# Altium PCB 20路舵机控制模块PCB.PcbDoc
Units mil, origin at the board's own origin, x right, y up, seen from the top; angles counter-clockwise.
Board outline 2520 x 1070 mil, 2 copper layers (Top Layer, Bottom Layer); 40 components, 38 nets, 146 pads, 35 vias.
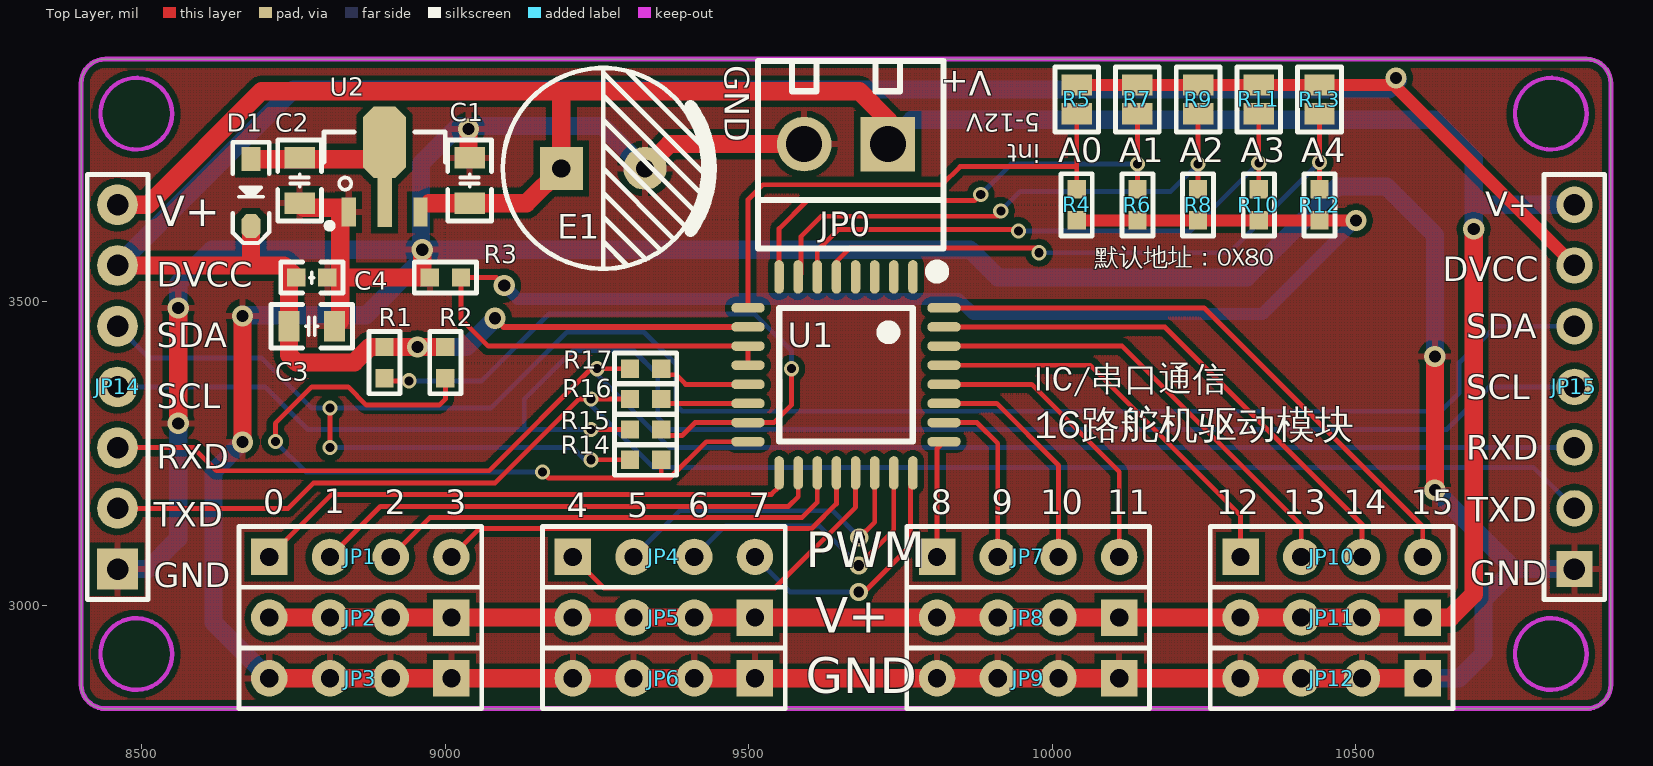
[diagram p0: Top Layer view]
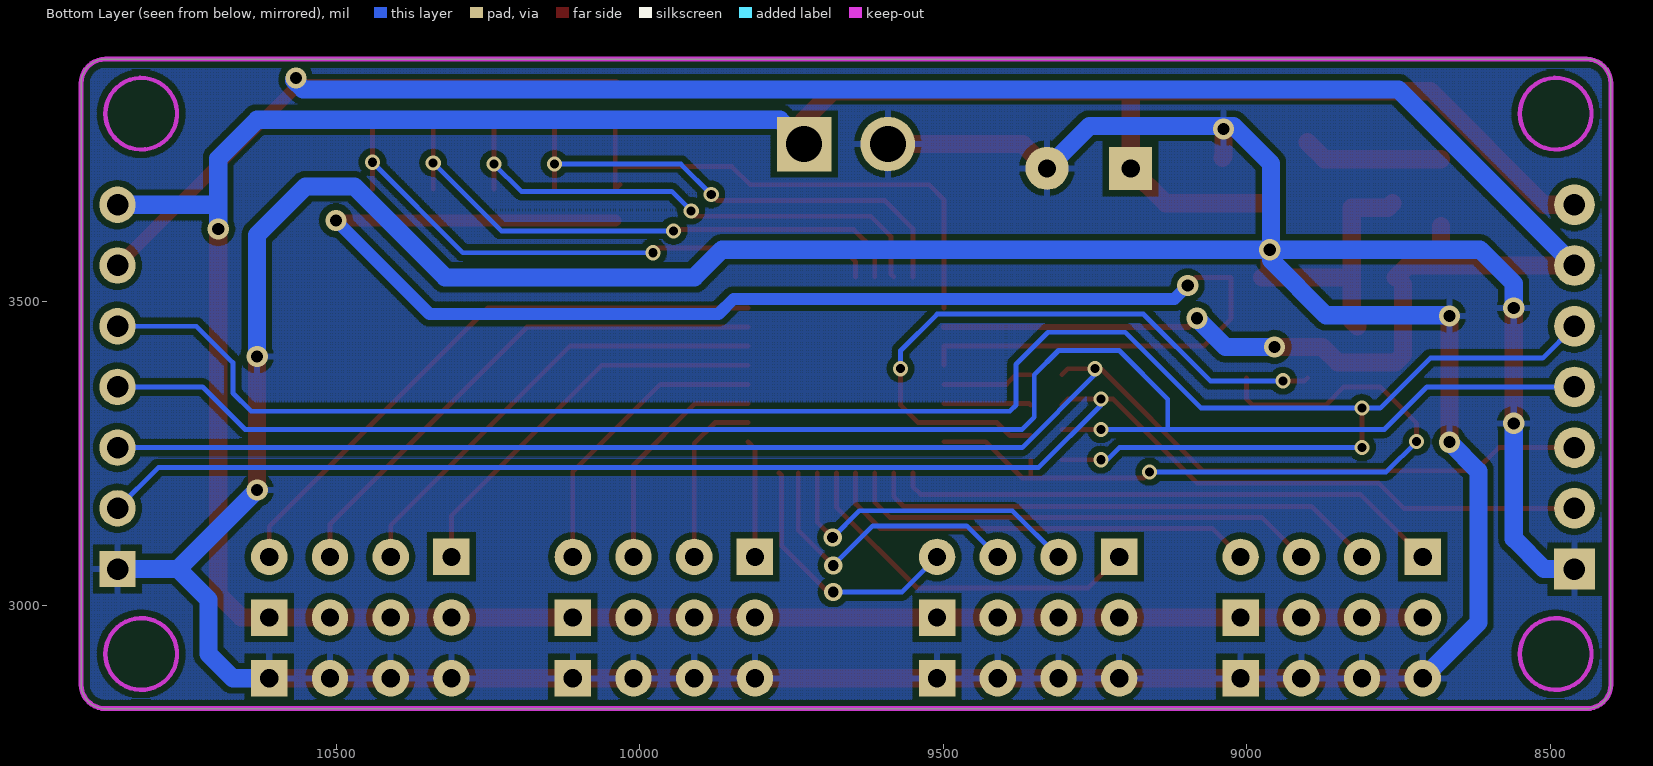
[diagram p1: Bottom Layer view, seen from below]

## Layer stack, top to bottom
Top Layer: signal copper 1.4
Dielectric: dielectric 12.6, FR-4, Dk 4.8
Bottom Layer: signal copper 1.4

## Board outline
8400,2870 8400,3860 cw(c8440,3860) 8440,3900 10880,3900 cw(c10880,3860) 10920,3860 10920,2870 cw(c10880,2870) 10880,2830 8440,2830 cw(c8440,2870)

## Design rules (kind name [scope] priority, off if disabled: settings)
Clearance [All] p1: gap=10
PolygonConnect [All] p1: connectstyle=Relief reliefconductorwidth=10 reliefentries=4 polygonreliefangle="90 Angle"
RoutingVias [All] p1: holewidth=28 width=50 viastyle="Through Hole" minholewidth=28 minwidth=50 maxholewidth=28 maxwidth=50
SilkscreenOverComponentPads [All] p1: minsilkscreentomaskgap=10
SolderMaskExpansion [All] p1: expansion=4
TestPointUsage [All] p1: valid=0 allowmultiple=FALSE
Testpoint [All] p1: side=15 testpointundercomponent=TRUE minsize=40 maxsize=100 preferedsize=60 minholesize=0 maxholesize=40 preferedholesize=32 testpointgrid=1 style=1023 order=0123456789
Width [All] p1: maxlimit=100 minlimit=6 preferedwidth=10
23 further rules are at their usual default settings.

## Components (designator, comment, footprint, x,y, rotation, side; value= is the part's Value field where it differs from the comment)
C1 "106" "C 0805_L" 9040,3700 r270 top
C2 "106" "C 0805_L" 8760,3700 r90 top
C3 "106" "C 0805_L" 8780,3460 r180 top
C4 "104" "C 0603_L" 8780,3540 r180 top
D1 "B5919WS" SOD-323 8680,3680 r270 top
E1 "470uF/16V" "CAP 3.5*8*11.5" 9260,3720 r0 top
JP0 "HDR-1X2" KF350-2P 9660,3760 r180 top
JP1 "HDR-1X4" HDR2.54-LI-4P 8860,3080 r0 top
JP2 "HDR-1X4" HDR2.54-LI-4P 8860,2980 r180 top
JP3 "HDR-1X4" HDR2.54-LI-4P 8860,2880 r180 top
JP4 "HDR-1X4" HDR2.54-LI-4P 9360,3080 r0 top
JP5 "HDR-1X4" HDR2.54-LI-4P 9360,2980 r180 top
JP6 "HDR-1X4" HDR2.54-LI-4P 9360,2880 r180 top
JP7 "HDR-1X4" HDR2.54-LI-4P 9960,3080 r0 top
JP8 "HDR-1X4" HDR2.54-LI-4P 9960,2980 r180 top
JP9 "HDR-1X4" HDR2.54-LI-4P 9960,2880 r180 top
JP10 "HDR-1X4" HDR2.54-LI-4P 10460,3080 r0 top
JP11 "HDR-1X4" HDR2.54-LI-4P 10460,2980 r180 top
JP12 "HDR-1X4" HDR2.54-LI-4P 10460,2880 r180 top
JP14 "HDR-1X7" HDR2.54-LI-7P#1 8460,3360 r90 top
JP15 "HDR-1X7" HDR2.54-LI-7P#2 10860,3360 r90 top
R1 "4.7K" "R 0603_L" 8900,3400 r90 top
R2 "4.7K" "R 0603_L" 9000,3400 r90 top
R3 "0R" "R 0603_L" 9000,3540 r0 top
R4 "4.7K" "R 0603_L" 10040,3660 r90 top
R5 "4.7K" "R 0805_L" 10040,3820 r270 top
R6 "4.7K" "R 0603_L" 10140,3660 r90 top
R7 "4.7K" "R 0805_L" 10140,3820 r270 top
R8 "4.7K" "R 0603_L" 10240,3660 r90 top
R9 "4.7K" "R 0805_L" 10240,3820 r270 top
R10 "4.7K" "R 0603_L" 10340,3660 r90 top
R11 "4.7K" "R 0805_L" 10340,3820 r270 top
R12 "4.7K" "R 0603_L" 10440,3660 r90 top
R13 "4.7K" "R 0805_L" 10440,3820 r270 top
R14 "200R" "R 0603_L" 9330,3240 r180 top
R15 "200R" "R 0603_L" 9330,3290 r180 top
R16 "200R" "R 0603_L" 9330,3340 r0 top
R17 "200R" "R 0603_L" 9330,3390 r0 top
U1 "STC8H1K16" "LQFP32 7X7_L" 9660,3380 r180 top
U2 "AMS1117-3V3" SOT89_L 8900,3660 r0 top

## Footprints (in the part's own frame and the unit in brackets; to place one, negate y for a bottom-side part, rotate by r counter-clockwise, add the part's x,y. Pads: shape width x height; smd on the part's side, far side on the other; paste and mask are expansions set on the pad)
"C 0603_L" [mil] "无极性贴片电容"
  rect 30x30 smd: 1(-25.59,0) 2(25.59,0)
  silkscreen extent -51,-26 51,26, body extent -31,-16 31,16, height 32
"C 0805_L" [mil] "无极性贴片电容"
  rect 35x50 smd: 1(-37.4,0) 2(37.4,0)
  silkscreen extent -67,-36 67,36, body extent -39,-24 39,24, height 20
"CAP 3.5*8*11.5" [mm] "脚距3.5mm直径8mm高度11.5mm"
  rect 1.8x1.8 hole 0.762: 1(-1.75,0)
  round 1.8 hole 0.762: 2(1.75,0)
  silkscreen extent -4.2,-4.2 4.5,4.2, body extent -4,-4 4.01,4, height 11.53
HDR2.54-LI-4P [mil] "排针，4脚"
  rect 60x60 hole 30: 1(-150,0)
  round 60 hole 30: 2(-50,0) 3(50,0) 4(150,0)
  silkscreen extent -200,-50 200,50, body extent -200,-50 200,50, height 335
HDR2.54-LI-7P#1 [mm] "排针，8脚"
  rect 1.7x1.7 hole 0.9: 1(-7.62,0)
  round 1.7 hole 0.9: 2(-5.08,0) 3(-2.54,0) 4(0,0) 5(2.54,0) 6(5.08,0) 7(7.62,0)
  silkscreen extent -8.89,-1.27 8.89,1.27, body extent -8.89,-1.27 8.89,1.27, height 8.5
HDR2.54-LI-7P#2 [mm] "排针，8脚"
  rect 1.524x1.524 hole 0.9: 1(-7.62,0)
  round 1.524 hole 0.9: 2(-5.08,0) 3(-2.54,0) 4(0,0) 5(2.54,0) 6(5.08,0) 7(7.62,0)
  silkscreen extent -8.89,-1.27 8.89,1.27, body extent -8.89,-1.27 8.89,1.27, height 8.5
KF350-2P [mil] "可拼接端子/10A"
  rect 90x90 hole 59.06: 1(-68.9,0)
  round 90 hole 59.06: 2(68.9,0)
  silkscreen extent -161,-137 145,172, body extent -154,-130 138,165, height 394
"LQFP32 7X7_L" [mm] "32脚，体宽7x7mm，脚距0.8mm"
  oval 0.4x1.4 smd: 1(-2.8,-4.096) 2(-2,-4.096) 3(-1.2,-4.096) 4(-0.4,-4.096) 5(0.4,-4.096) 6(1.2,-4.096) 7(2,-4.096) 8(2.8,-4.096) 17(2.8,4.108) 18(2,4.108) 19(1.2,4.108) 20(0.4,4.108) 21(-0.4,4.108) 22(-1.2,4.108) 23(-2,4.108) 24(-2.8,4.108)
  oval 1.4x0.4 smd: 9(4.102,-2.8) 10(4.102,-2) 11(4.102,-1.2) 12(4.102,-0.4) 13(4.102,0.4) 14(4.102,1.2) 15(4.102,2) 16(4.102,2.8) 25(-4.102,2.8) 26(-4.102,2) 27(-4.102,1.2) 28(-4.102,0.4) 29(-4.102,-0.4) 30(-4.102,-1.2) 31(-4.102,-2) 32(-4.102,-2.8)
  silkscreen extent -4.06,-4.57 2.79,2.79, body extent -4.5,-4.5 4.5,4.5, height 1.45
"R 0603_L" [mil] "1/10W贴片电阻"
  rect 30x30 smd: 1(-25.59,0) 2(25.59,0)
  silkscreen extent -51,-26 51,26, body extent -31,-16 32,16, height 16
"R 0805_L" [mil] "1/8W贴片电阻"
  rect 35x50 smd: 1(-37.4,0) 2(10,0)
  silkscreen extent -67,-36 40,36, body extent -39,-25 39,25, height 20
SOD-323 [mm] "1.8x1.3X0.9mm（长宽高，不包括引脚）"
  rect 1x0.8 smd: 1(-1.4,0)
  oct 1x0.8 smd: 2(1.4,0)
  silkscreen extent -2.11,-0.76 2.11,0.76, body extent -1.34,-0.63 1.31,0.67, height 1
SOT89_L [mm] "4.6x4.3x1.6mm(长宽高)"
  rect 0.6x1.2 smd: 1(-1.5,-0.303) 3(1.5,-0.303)
  rect 0.6x2.1 smd: 2(0,0.127)
  oct 1.8x3 smd: 2(0,2.616)
  silkscreen extent -2.54,-1 2.54,3.05, body extent -2.3,-0.88 2.3,3.42, height 1.6

## Part data
C1 C2 C3 C4: library part C, "无极性贴片电容"
D1: library part 1N5819, "肖特基二极管"
E1: library part C-CAP, "直插电解电容"
JP0: library part "Header 2", "2P接插件"
JP1 JP2 JP3 JP4 JP5 JP6 JP7 JP8 JP9 JP10 JP11 JP12: library part "Header 4", "4P接插件"
JP14 JP15: library part "Header 7", "7P接插件"
R1 R2 R3 R4 R5 R6 R7 R8 R9 R10 R11 R12 R13 R14 R15 R16 R17: library part R, "贴片电阻"
U2: library part AMS1117, "三端稳压芯片"

## Via types
v1: diameter 25, hole 15, Top Layer to Bottom Layer, 18 vias
v2: diameter 35, hole 20, Top Layer to Bottom Layer, 14 vias
v3: diameter 30, hole 18, Top Layer to Bottom Layer, 3 vias

## Nets (pads, with @x,y where several pads share a name; then routed paths per layer and width w, separated by ;. In a path a pad name is that pad's centre, name@x,y a point inside that pad or via, vN(x,y) a via of type N, cw(c..) or ccw(c..) an arc to the next point about the centre after c; other vN are vias at no path point)
A0: R4.2 R5.2 U1.9 | length 877.9
  Top Layer w8: U1.9 9498.52,3668.52 9523,3693 9818,3693 9848,3723 10040,3723 ; R4.2@10032.09,3693.5 R4.2 10040,3723 ; R5.2 10040,3723
A1: R6.2 R7.2 U1.8 | length 838.2
  Top Layer w8: U1.8 9549.76,3620.76 9596,3667 9872,3667 v1(9882,3677) ; R6.2 v1(10140,3727) R7.2
  Bottom Layer w8: v1(9882,3677) 9932,3727 v1(10140,3727)
A2: R8.2 R9.2 U1.7 | length 889.7
  Top Layer w8: U1.7 9586,3545.98 9586,3608 9619,3641 v1@9912,3641 ; R8.2 v1(10240,3727) R9.2
  Bottom Layer w8: v1(9915,3650) 9947,3682 10195,3682 v1(10240,3727)
A3: R10.2 R11.2 U1.6 | length 955.7
  Top Layer w8: U1.6 9612.76,3584.76 9647,3619 v1@9944,3619 ; R10.2 v1(10340,3729) R11.2
  Bottom Layer w8: v1(9944,3617) 10228,3617 v1(10340,3729)
A4: R12.2 R13.2 U1.5 | length 1016.3
  Top Layer w8: U1.5 9644.25,3566.25 9667,3589 v1@9978,3589 ; R12.2 v1(10440,3730) R13.2
  Bottom Layer w8: v1(9978,3581) 10291,3581 v1(10440,3730)
DJ0: JP1.1 U1.17 | length 910.2
  Top Layer w8: JP1.1 8813,3183 9537,3183 9549.76,3195.76 U1.17
DJ1: JP1.2 U1.18 | length 851.4
  Top Layer w8: JP1.2 8893,3163 9565,3163 9581.26,3179.26 U1.18
DJ2: JP1.3 U1.19 | length 788.5
  Top Layer w8: JP1.3 8975,3145 9588,3145 9612.76,3169.76 U1.19
DJ3: JP1.4 U1.20 | length 721.4
  Top Layer w8: JP1.4 9057,3127 9604,3127 9644.25,3167.25 U1.20
DJ4: JP4.1 U1.21 | length 598.4
  Top Layer w8: JP4.1 9261,3029 9543,3029 9675.75,3161.75 U1.21
DJ5: JP4.2 U1.22 | length 538.4
  Top Layer w8: v3(9682,3112) 9707.24,3137.24 U1.22
  Bottom Layer w8: JP4.2 9386,3156 9638,3156 v3(9682,3112)
DJ6: JP4.3 U1.23 | length 495.2
  Top Layer w8: v3(9681,3066) 9738.74,3123.74 U1.23
  Bottom Layer w8: JP4.3 9461,3131 9616,3131 v3(9681,3066)
DJ7: JP4.4 U1.24 | length 430.9
  Top Layer w8: v3@9685.5,3017.5 9766,3098 9766,3214.05 U1.24
  Bottom Layer w8: JP4.4 9568,3022 v3(9681,3022)
DJ8: JP7.1 U1.25 | length 210.8
  Top Layer w8: JP7.1@9821.48,3091.48 JP7.1 9810,3258.28 U1.25
DJ9: JP7.2 U1.26 | length 289.7
  Top Layer w8: U1.26 9875.74,3301.26 9910,3267 JP7.2
DJ10: JP7.3 U1.27 | length 381.7
  Top Layer w8: U1.27 9908.24,3332.76 10010,3231 JP7.3
DJ11: JP7.4 U1.28 | length 488.3
  Top Layer w8: U1.28 9965.75,3364.25 10110,3220 JP7.4
DJ12: JP10.1 U1.29 | length 659.1
  Top Layer w8: U1.29 10062.25,3395.75 10310,3148 JP10.1
DJ13: JP10.2 U1.30 | length 762.8
  Top Layer w8: U1.30 10114.76,3427.24 10410,3132 JP10.2
DJ14: JP10.3 U1.31 | length 877
  Top Layer w8: U1.31 10185.26,3458.74 10510,3134 JP10.3
DJ15: JP10.4 U1.32 | length 987.7
  Top Layer w8: U1.32 10249.76,3490.24 10610,3130 JP10.4
DJ16: U1.1
DJ17: U1.2
DJ18: U1.3
DJ19: U1.4
DVCC: C3.2 C4.2 D1.2 JP14.6 JP15.6 R1.2 R2.2 R5.1 R7.1 R9.1 R11.1 R13.1 U1.10 | length 4510.8
  Top Layer w10: v2(9082,3473) 9096.26,3458.74 U1.10
  Top Layer w20: R5.1 R7.1 R9.1 R11.1 R13.1 10562.6,3857.4 JP15.6
  Top Layer w30: JP14.6 8681,3560 ; D1.2 8680,3561 8681,3560 ; C4.2@8742.6,3528.19 C3.2 8742.6,3412.4 8755,3400 8849.9,3400 8875.49,3425.59 R1.2 v2(8954,3425.59) R2.2 ; C4.2 8734.42,3560 8681,3560
  Bottom Layer w30: JP14.6 8750,3850 10554,3850 10569,3865 10569,3866 v2(10566,3869) ; v2(8954,3425.59) 9034.59,3425.59 v2(9082,3473)
GND: R3.2 R4.1 R6.1 R8.1 R10.1 R12.1 U1.11 U1.12 | length 2613.8
  Top Layer w8: v2(9097,3527) 9084,3540 R3.2 9025.59,3472.41 9070.76,3427.24 U1.11 U1.12
  Top Layer w20: R4.1 R6.1 R8.1 R10.1 R12.1 v2@10500,3634.41
  Bottom Layer w20: v2(9097,3527) 9119,3505 9845,3505 9870,3480 10346,3480 v2(10500,3634)
NetC2_2: C2.2 D1.1 U2.2 | length 231.5
  Top Layer w30: D1.1 8872.12,3735.12 U2.2@8900,3763
NetR1_1: R1.1 R15.1 U1.15 | length 1067.4
  Top Layer w8: R1.1 8904.41,3370 v1(8940,3370) ; R15.1@9355.59,3280 9390,3280 9411.26,3301.26 U1.15 9541.26,3301.26 9570,3330 v1(9570,3390)
  Bottom Layer w8: v1(8940,3370) 9060,3370 9170,3480 9510,3480 9570,3420 v1(9570,3390)
NetR2_1: R2.1 R14.1 U1.16 | length 1239.6
  Top Layer w8: v1(8720,3270) 8720,3300 8780,3360 8840,3360 8870,3330 8990,3330 9000,3340 R2.1 ; v1(9160,3220) 9170,3210 9370,3210 9429.76,3269.76 U1.16 ; 9355.59,3214.41 R14.1
  Bottom Layer w8: v1(8720,3270) 8770,3220 v1(9160,3220)
NetR16_2: R16.2 U1.14 | length 144.1
  Top Layer w8: R16.2@9355.59,3330 9358.35,3332.76 U1.14
NetR17_2: R17.2 U1.13 | length 149.5
  Top Layer w8: R17.2@9355.59,3380 9380,3380 9395.75,3364.25 U1.13
PGND: C1.1 C2.1 C3.1 C4.1 E1.2 JP0.2 JP3.1 JP3.2 JP3.3 JP3.4 JP6.1 JP6.2 JP6.3 JP6.4 JP9.1 JP9.2 JP9.3 JP9.4 JP12.1 JP12.2 JP12.3 JP12.4 JP14.1 JP15.1 R3.1 U2.1 | length 7975.6
  Top Layer w30: v2(8560,3300) v2(8560,3490) ; v2(8666,3269) v2(8666,3477) ; JP3.4 JP3.3 JP3.2 JP3.1 JP6.4 JP6.3 JP6.2 JP6.1 JP9.4 JP9.3 JP9.2 JP9.1 JP12.4 JP12.3 JP12.2 JP12.1 ; C2.1 8767.6,3655 8827,3655 8827,3544 ; C3.1 8827,3469.6 8827,3544 ; R3.1@8962,3552.4 v2(8962,3586) ; R3.1 8831,3540 8827,3544 ; v2(9038,3785) 9038,3739.4 C1.1 ; E1.2 9368.9,3760 JP0.2 ; v2(10630,3190) v2(10630,3410)
  Bottom Layer w30: JP14.1 8510,3060 8560,3110 v2(8560,3300) ; v2(8560,3490) 8560,3530 8616,3586 v2@8960,3586 ; v2(8666,3269) 8618,3221 8618,2972 JP3.4 ; v2@8666,3478 8869,3478 8960,3569 v2@8960,3586 ; v2(8962,3586) 9864,3586 9910,3540 10320,3540 10470,3690 10550,3690 10630,3610 v2(10630,3410) ; E1.2 9258.9,3790 9022,3790 8960,3728 v2@8960,3586 ; JP12.1 10670,2880 10710,2920 10710,3010 10760,3060 ; v2(10630,3190) 10760,3060 ; JP15.1 10760,3060
RXD: JP14.3 JP15.3 R17.1 | length 2595.6
  Top Layer w8: JP14.3 8585,3260 8623,3222 9072,3222 9240,3390 9294.4,3390 R17.1@9304.41,3380
  Bottom Layer w8: v1(9250,3390) 9250,3380 9370,3260 JP15.3@10852,3260
SCL: JP14.4 JP15.4 R15.2 | length 2837.4
  Top Layer w8: v1(9240,3290) R15.2
  Bottom Layer w8: JP14.4 8703,3360 8773,3290 9130,3290 ; v1(9240,3290) 9130,3290 ; JP15.4@10833,3360 JP15.4 10720,3360 10650,3290 9370,3290 9350,3310 9350,3380 9310,3420 9210,3420 9130,3340 9130,3290
SDA: JP14.5 JP15.5 R14.2 | length 3255.9
  Top Layer w8: v1(8810,3260) v1(8810,3325) ; v1(9240,3240) R14.2
  Bottom Layer w8: JP14.5 8512.54,3407.46 8697.54,3407.46 8780,3325 v1(8810,3325) 9075,3325 9200,3450 9327.24,3450 9380,3397.24 9380,3330 9390,3320 10640,3320 10670,3350 10670,3400 10730,3460 JP15.5 ; v1(8810,3260) 9210,3260 9230,3240 v1(9240,3240)
TXD: JP14.2 JP15.2 R16.1 | length 2623.5
  Top Layer w8: JP14.2 8741,3160 8783,3202 9082,3202 9220,3340 9294.4,3340 R16.1@9304.41,3330
  Bottom Layer w8: v1(9240,3340) 9240,3330 9343,3227 10793,3227 JP15.2
V+: C1.2 E1.1 JP0.1 JP2.1 JP2.2 JP2.3 JP2.4 JP5.1 JP5.2 JP5.3 JP5.4 JP8.1 JP8.2 JP8.3 JP8.4 JP11.1 JP11.2 JP11.3 JP11.4 JP14.7 JP15.7 U2.3 | length 5620.1
  Top Layer w30: JP14.7 8510,3660 8697.06,3847.06 9681.84,3847.06 JP0.1@9728.9,3800 ; JP2.4 JP2.3 JP2.2 JP2.1 JP5.4 JP5.3 JP5.2 JP5.1 JP8.4 JP8.3 JP8.2 JP8.1 JP11.4 JP11.3 JP11.2 JP11.1 10656,2980 10694,3018 v2(10694,3620) ; 8973.59,3662.6 C1.2 9133.7,3662.6 E1.1 9191.1,3847.06
  Bottom Layer w30: JP0.1 9768.9,3800 10630,3800 10694,3736 v2(10694,3620) ; 10700,3660 JP15.7

## Polygon pours and split planes (outlines as drawn)
PGND on Top Layer "Top Layer-No Net" (hatched 90Degree grid 2 track 2, remove dead copper, pour order 1000): 8410,3890 8480,3890 10910,3890 10910,2840 8460,2840 8410,2840
PGND on Bottom Layer "Top Layer-No Net" (hatched 90Degree grid 2 track 2, remove dead copper, pour order 1001): 8410,3890 8520,3890 10910,3890 10910,2840 8410,2840

## Keep-outs
Keep-Out Layer:
  circle w7.09: c8490.94,3810 r59.06
  circle w7.09: c8490.94,2920 r59.06
  circle w7.09: c10820.94,2920 r59.06
  circle w7.09: c10820.94,3810 r59.06
  lines w8: 8400,2870 ccw(c8440,2870) 8440,2830 10880,2830 ccw(c10880,2870) 10920,2870 10920,3860 ccw(c10880,3860) 10880,3900 8440,3900 ccw(c8440,3860) 8400,3860 8400,2870

## Silkscreen, mask and mechanical layers (free items; w line width, h text height)
Top Overlay:
  text "GND" at 9460,3890 h40 r270
  text "V+" at 9900,3880 h40 r180
  text "5-12V" at 9980,3810 h30 r180
  text "int" at 9980,3760 h30 r180
  text "A0" at 10010,3730 h40
  text "A1" at 10110,3730 h40
  text "A2" at 10210,3730 h40
  text "A3" at 10310,3730 h40
  text "A4" at 10410,3730 h40
  text "V+" at 10713,3641 h40
  text "V+" at 8525,3625 h50
  text "默认地址：0X80" at 10070,3550 h50
  text "DVCC" at 10643,3534 h40
  text "DVCC" at 8525,3525 h40
  text "SDA" at 10682,3440 h40
  text "SDA" at 8525,3425 h40
  text "IIC/串口通信" at 9970,3340 h70
  text "SCL" at 10682,3340 h40
  text "SCL" at 8525,3325 h40
  text "16路舵机驱动模块" at 9970,3260 h80
  text "RXD" at 10682,3240 h40
  text "RXD" at 8525,3225 h40
  text "1" at 8800,3152 h40
  text "0" at 8700,3150 h40
  text "2" at 8900,3150 h40
  text "3" at 9000,3150 h40
  text "8" at 9800,3150 h40
  text "9" at 9900,3150 h40
  text "10" at 9980,3150 h40
  text "11" at 10090,3150 h40
  text "12" at 10270,3150 h40
  text "13" at 10380,3150 h40
  text "14" at 10480,3150 h40
  text "15" at 10590,3150 h40
  text "4" at 9200,3145 h40
  text "5" at 9300,3145 h40
  text "6" at 9400,3145 h40
  text "7" at 9500,3145 h40
  text "TXD" at 10684,3138 h40
  text "TXD" at 8520,3130 h40
  text "PWM" at 9594,3043 h100
  text "GND" at 10688,3033 h40
  text "GND" at 8520,3030 h40
  text "V+" at 9609,2935 h100
  text "GND" at 9594,2836 h100